# Altium PCB Def_PCB.PcbDoc
Units mm, origin at the board's own origin, x right, y up, seen from the top; angles counter-clockwise.
Board outline 85.6 x 54 mm, 2 copper layers (Top Layer, Bottom Layer); 2 components, 0 nets, 4 pads, 0 vias.
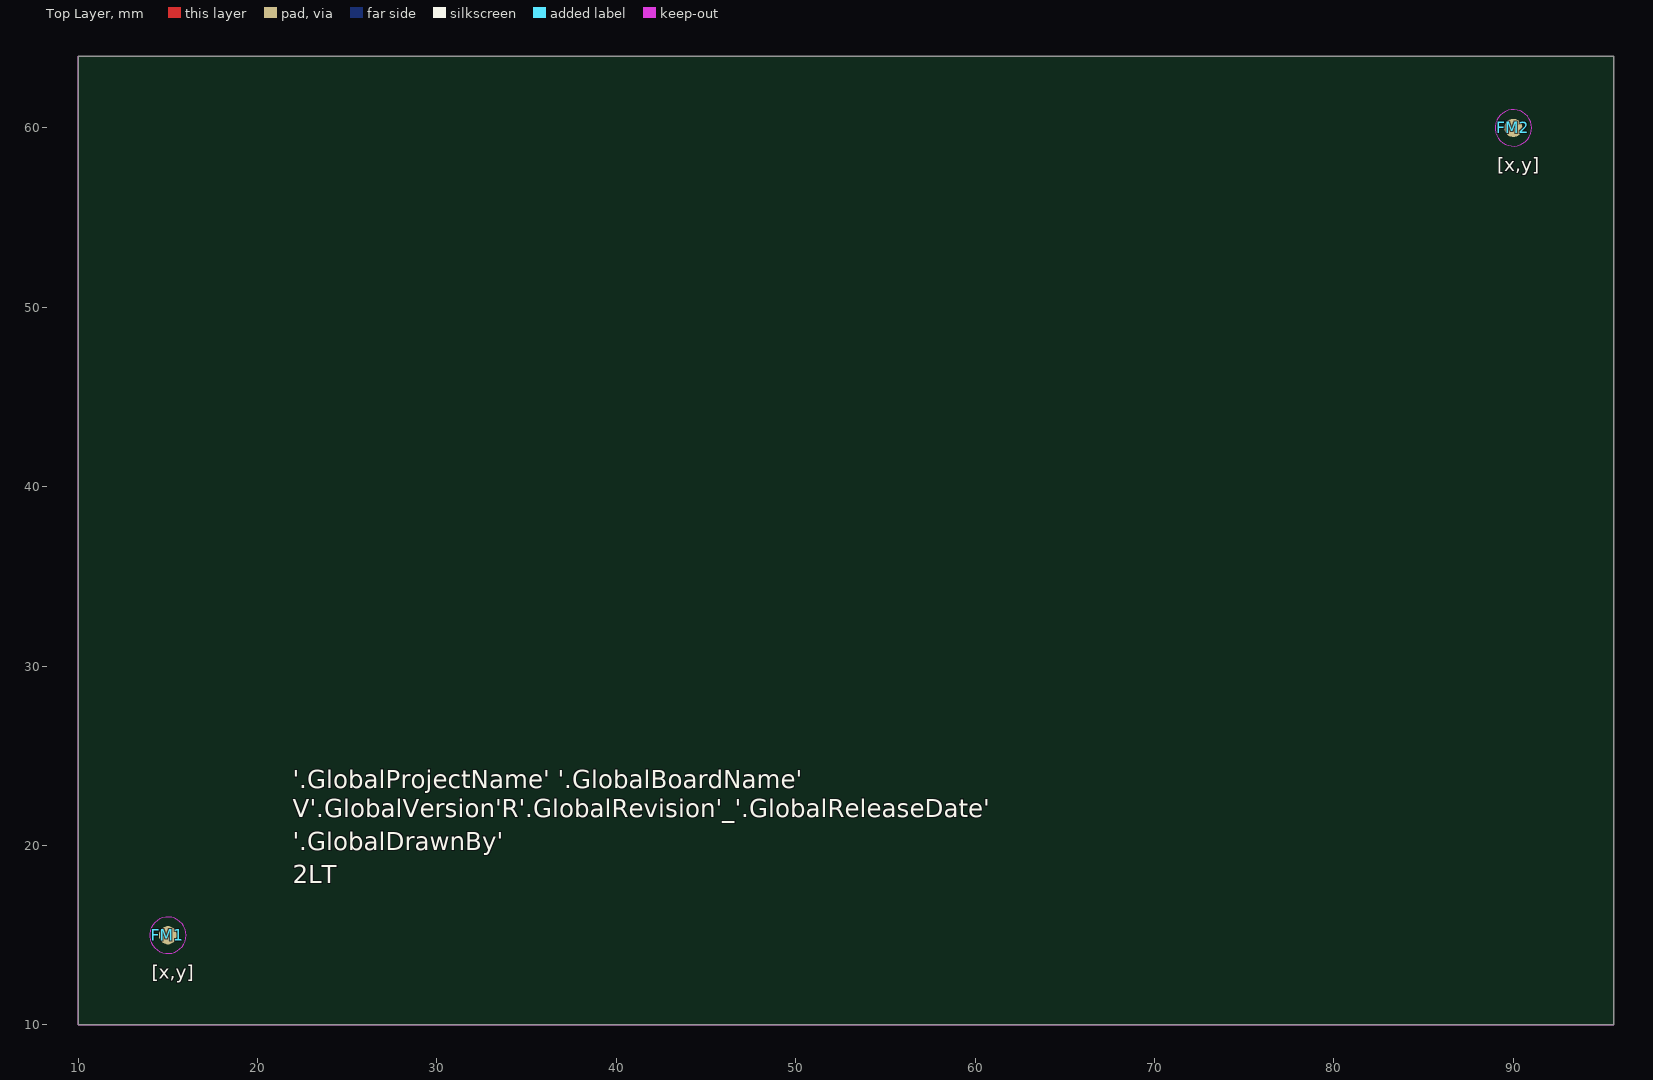
[diagram p0: Top Layer view]
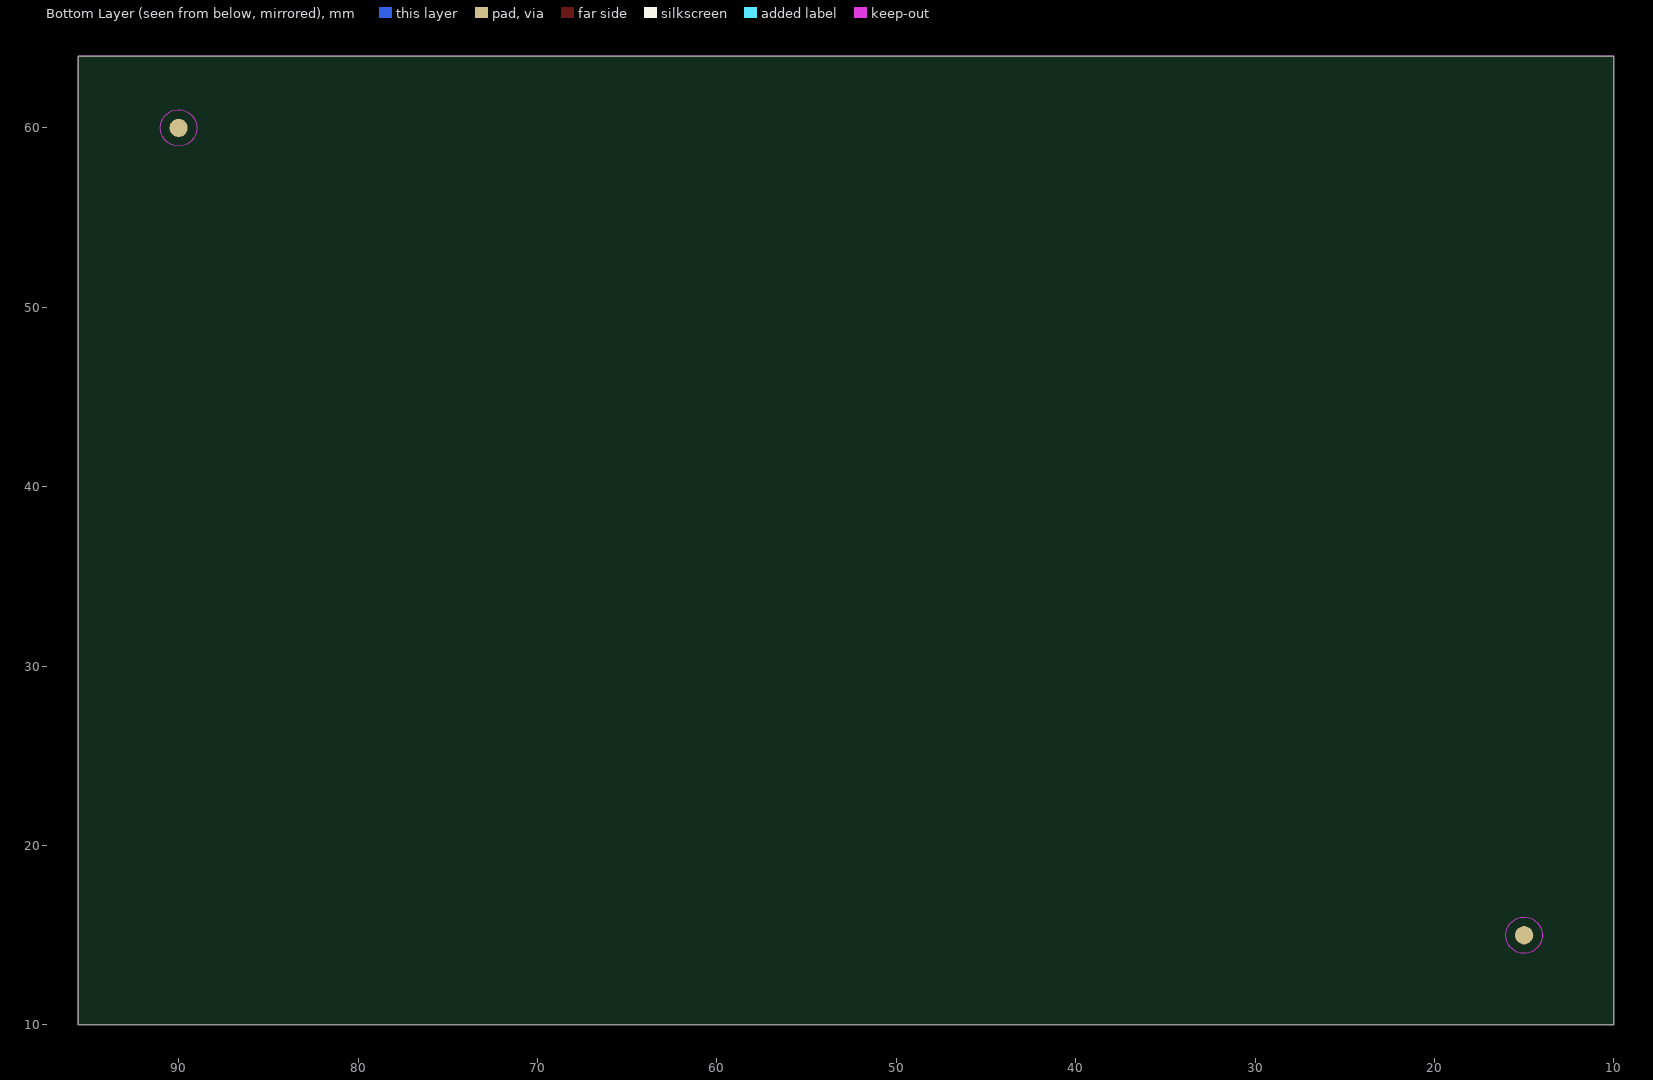
[diagram p1: Bottom Layer view, seen from below]

## Layer stack, top to bottom
Top Solder: solder mask 0.0102, Solder Resist, Dk 3.5
Top Layer: signal copper 0.0356
Dielectric 1: dielectric 0.32, FR-4, Dk 4.8
Bottom Layer: signal copper 0.0356
Bottom Solder: solder mask 0.0102, Solder Resist, Dk 3.5

## Board outline
10,10 95.6,10 95.6,64 10,64

## Design rules (kind name [scope] priority, off if disabled: settings)
Clearance Clearance_Vias [IsVia] p1: gap=0 ignorepadtopadclearanceinfootprint=FALSE except(0.127: SMDPad-Hole THPad-Hole)
Clearance Clearance_outline [OnLayer('Keep-Out Layer')] p2: gap=0.203 ignorepadtopadclearanceinfootprint=FALSE
Clearance [All] p3: gap=0.152 ignorepadtopadclearanceinfootprint=FALSE
ComponentClearance [All] p1: gap=0.127 collisioncheckmode=3 verticalgap=0.254 showdistances=FALSE
DiffPairsRouting [All] p1: maxlimit=0.254 minlimit=0.152 mostfreqgap=0.152 toplayer_minwidth=0.381 toplayer_maxwidth=0.889 toplayer_prefwidth=0.508 bottomlayer_minwidth=0.381 bottomlayer_maxwidth=0.889 bottomlayer_prefwidth=0.508 maxuncoupledlength=12.7
HoleSize [All] p1: absolutevalues=TRUE maxlimit=5.08 minlimit=0.254 maxpercent=100.000 minpercent=0.000
MinimumSolderMaskSliver [All] p1: minsoldermaskwidth=0.051
NetAntennae [All] p1: netantennaetolerance=0.025
PasteMaskExpansion [All] p1: expansion=-0.025
PlaneClearance [All] p1: clearance=0.254
PlaneConnect [All] p1: planeconnectstyle=Relief reliefexpansion=0.254 reliefentries=4 reliefconductorwidth=0.254 reliefairgap=0.254
PolygonConnect PolygonConnect_Vias [All vs IsVia] p1: connectstyle=Direct reliefconductorwidth=0.254 reliefentries=4 polygonreliefangle="90 Angle" airgapwidth=0.254
PolygonConnect [All] p2: connectstyle=Relief reliefconductorwidth=0.203 reliefentries=4 polygonreliefangle="90 Angle" airgapwidth=0.178
RoomDefinition Def_sch [InComponentClass('Def_sch')] p1: confinementstyle=ConfineIn formatcopy=TRUE lockcomponents=FALSE outline 96.749,11.4 102.619,11.4 102.619,15.24 96.749,15.24
RoutingVias [All] p1: holewidth=0.381 width=0.635 viastyle="Through Hole" minholewidth=0.254 minwidth=0.381 maxholewidth=0.889 maxwidth=1.143
SilkToSilkClearance [All] p1: silktosilkclearance=0.051
SilkToSolderMaskClearance [IsPad] p1: minsilkscreentomaskgap=0.003 clearancetoexposedcopper=TRUE
SolderMaskExpansion [All] p1: expansion=0.051 istentingtop=FALSE
UnRoutedNet [All] p1: checkbadconnections=TRUE
Width [All] p1: maxlimit=2.54 minlimit=0.152 preferedwidth=0.254
19 further rules are at their usual default settings.

## Components (designator, comment, footprint, x,y, rotation, side; value= is the part's Value field where it differs from the comment)
FM1 "[x,y]" FM_40MIL_2F 15,15 r0 top
FM2 "[x,y]" FM_40MIL_2F 90,60 r0 top

## Footprints (in the part's own frame and the unit in brackets; to place one, negate y for a bottom-side part, rotate by r counter-clockwise, add the part's x,y. Pads: shape width x height; smd on the part's side, far side on the other; paste and mask are expansions set on the pad)
FM_40MIL_2F [mil]
  round 40 smd paste-100 mask+20: 0(0,0)
  round 40 smd far side paste-100 mask+20: 0(0,0)
  Keep-Out Layer circle w1: c0,0 r40

## Part data
FM1 FM2: library part FM_40mil_2F, "Fiducial Mark 40 Mil 2 Face", Last modified by="C-D Viveros", Last modified date=20190319

## Nets (pads, with @x,y where several pads share a name; then routed paths per layer and width w, separated by ;. In a path a pad name is that pad's centre, name@x,y a point inside that pad or via, vN(x,y) a via of type N, cw(c..) or ccw(c..) an arc to the next point about the centre after c; other vN are vias at no path point)
pads on no net: FM1.0 FM2.0

## Keep-outs
Keep-Out Layer:
  the board outline again, w0.025

## Silkscreen, mask and mechanical layers (free items; w line width, h text height)
Top Overlay:
  text "'.GlobalProjectName' '.GlobalBoardName'" at 21.976,23.185 h1
  text "V'.GlobalVersion'R'.GlobalRevision'_'.GlobalReleaseDate'" at 21.976,21.571 h1
  text "'.GlobalDrawnBy'" at 21.976,19.74 h1
  text "2LT" at 21.976,17.909 h1
BoardShape:
  lines w0.203: 10,10 95.6,10 95.6,64 10,64 10,10
  lines w0.3: 100,16 170,16 ; 100,22 170,22 ; 100,28 170,28 ; 100,34 170,34 ; 100,40 170,40 ; 100,46 170,46 ; 100,52 170,52 ; 140,10 140,58 ; 100,10 100,58 170,58 170,10 ; 100,10 170,10 ; 100,10 170,10
  text "FABRICATION NOTES:" at 101.341,53.922 h2.54
  text "1. Dielectric Material:" at 101.341,48.027 h2.54
  text "FR4" at 141.341,48.027 h2.54
  text "2. Thickness:" at 101.341,41.906 h2.54
  text "1 mm" at 141.341,41.906 h2.54
  text "3. Solder Mask:" at 101.341,35.785 h2.54
  text "Red" at 141.341,35.785 h2.54
  text "4. Silkscreen:" at 101.341,29.664 h2.54
  text "White" at 141.341,29.664 h2.54
  text "5. Copper:" at 101.341,24.389 h2.54
  text "1 Oz" at 141.341,23.543 h2.54
  text "6. Plating:" at 101.341,18.268 h2.54
  text "Pb-Free HASL" at 141.341,17.422 h2.54
  text "7. No. of Layers" at 101.341,12.147 h2.54
  text "2 layers" at 141.341,12.147 h2.54